# Altium PCB PCB1.PcbDoc
Units mm, origin at the board's own origin, x right, y up, seen from the top; angles counter-clockwise.
Board outline 53.35 x 53.15 mm, 2 copper layers (Top Layer, Bottom Layer); 14 components, 14 nets, 68 pads, 9 vias.
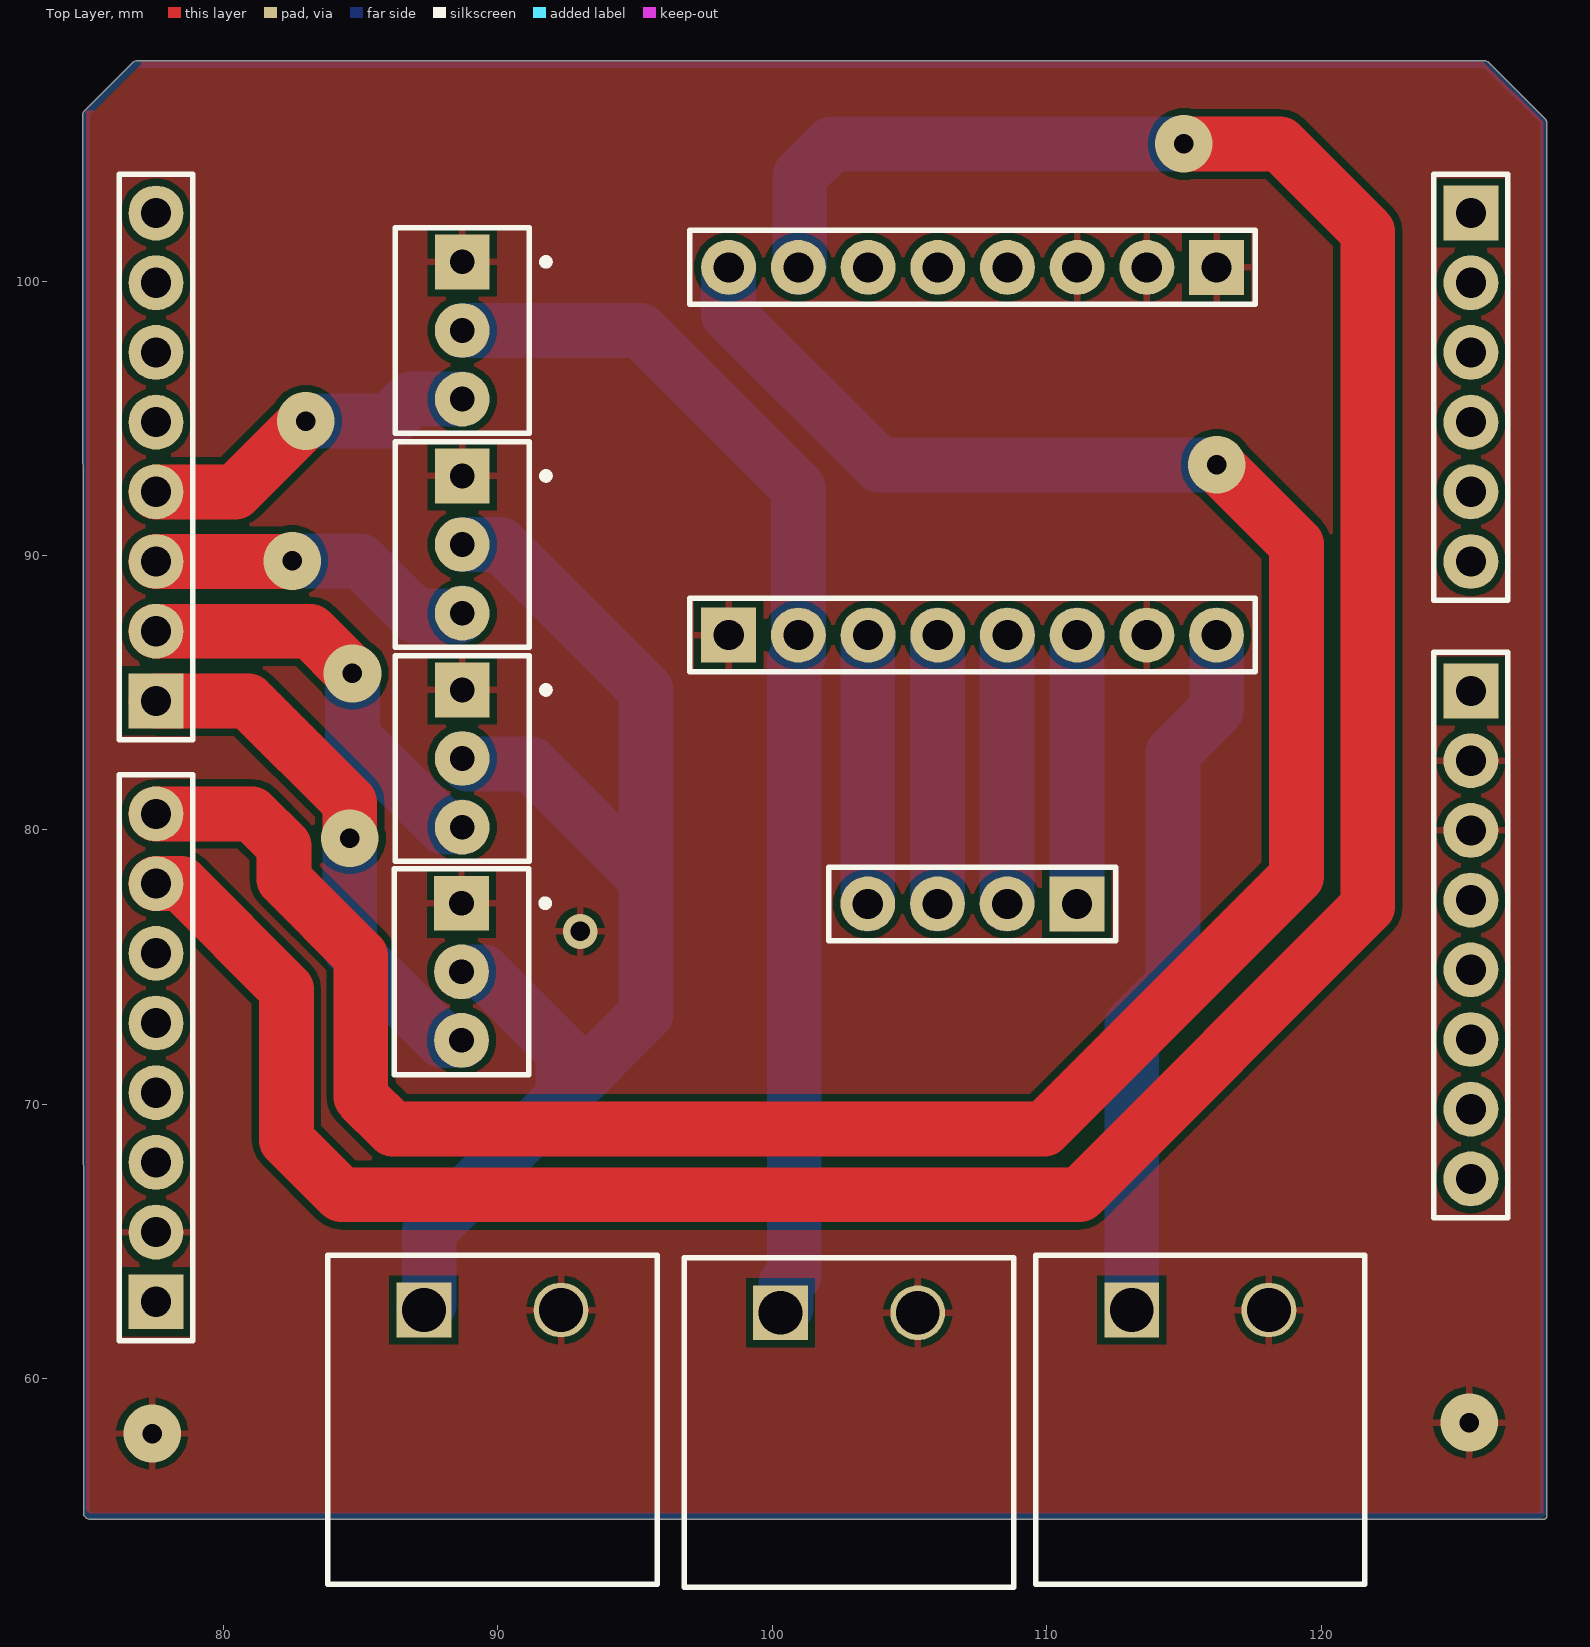
[diagram p0: Top Layer view]
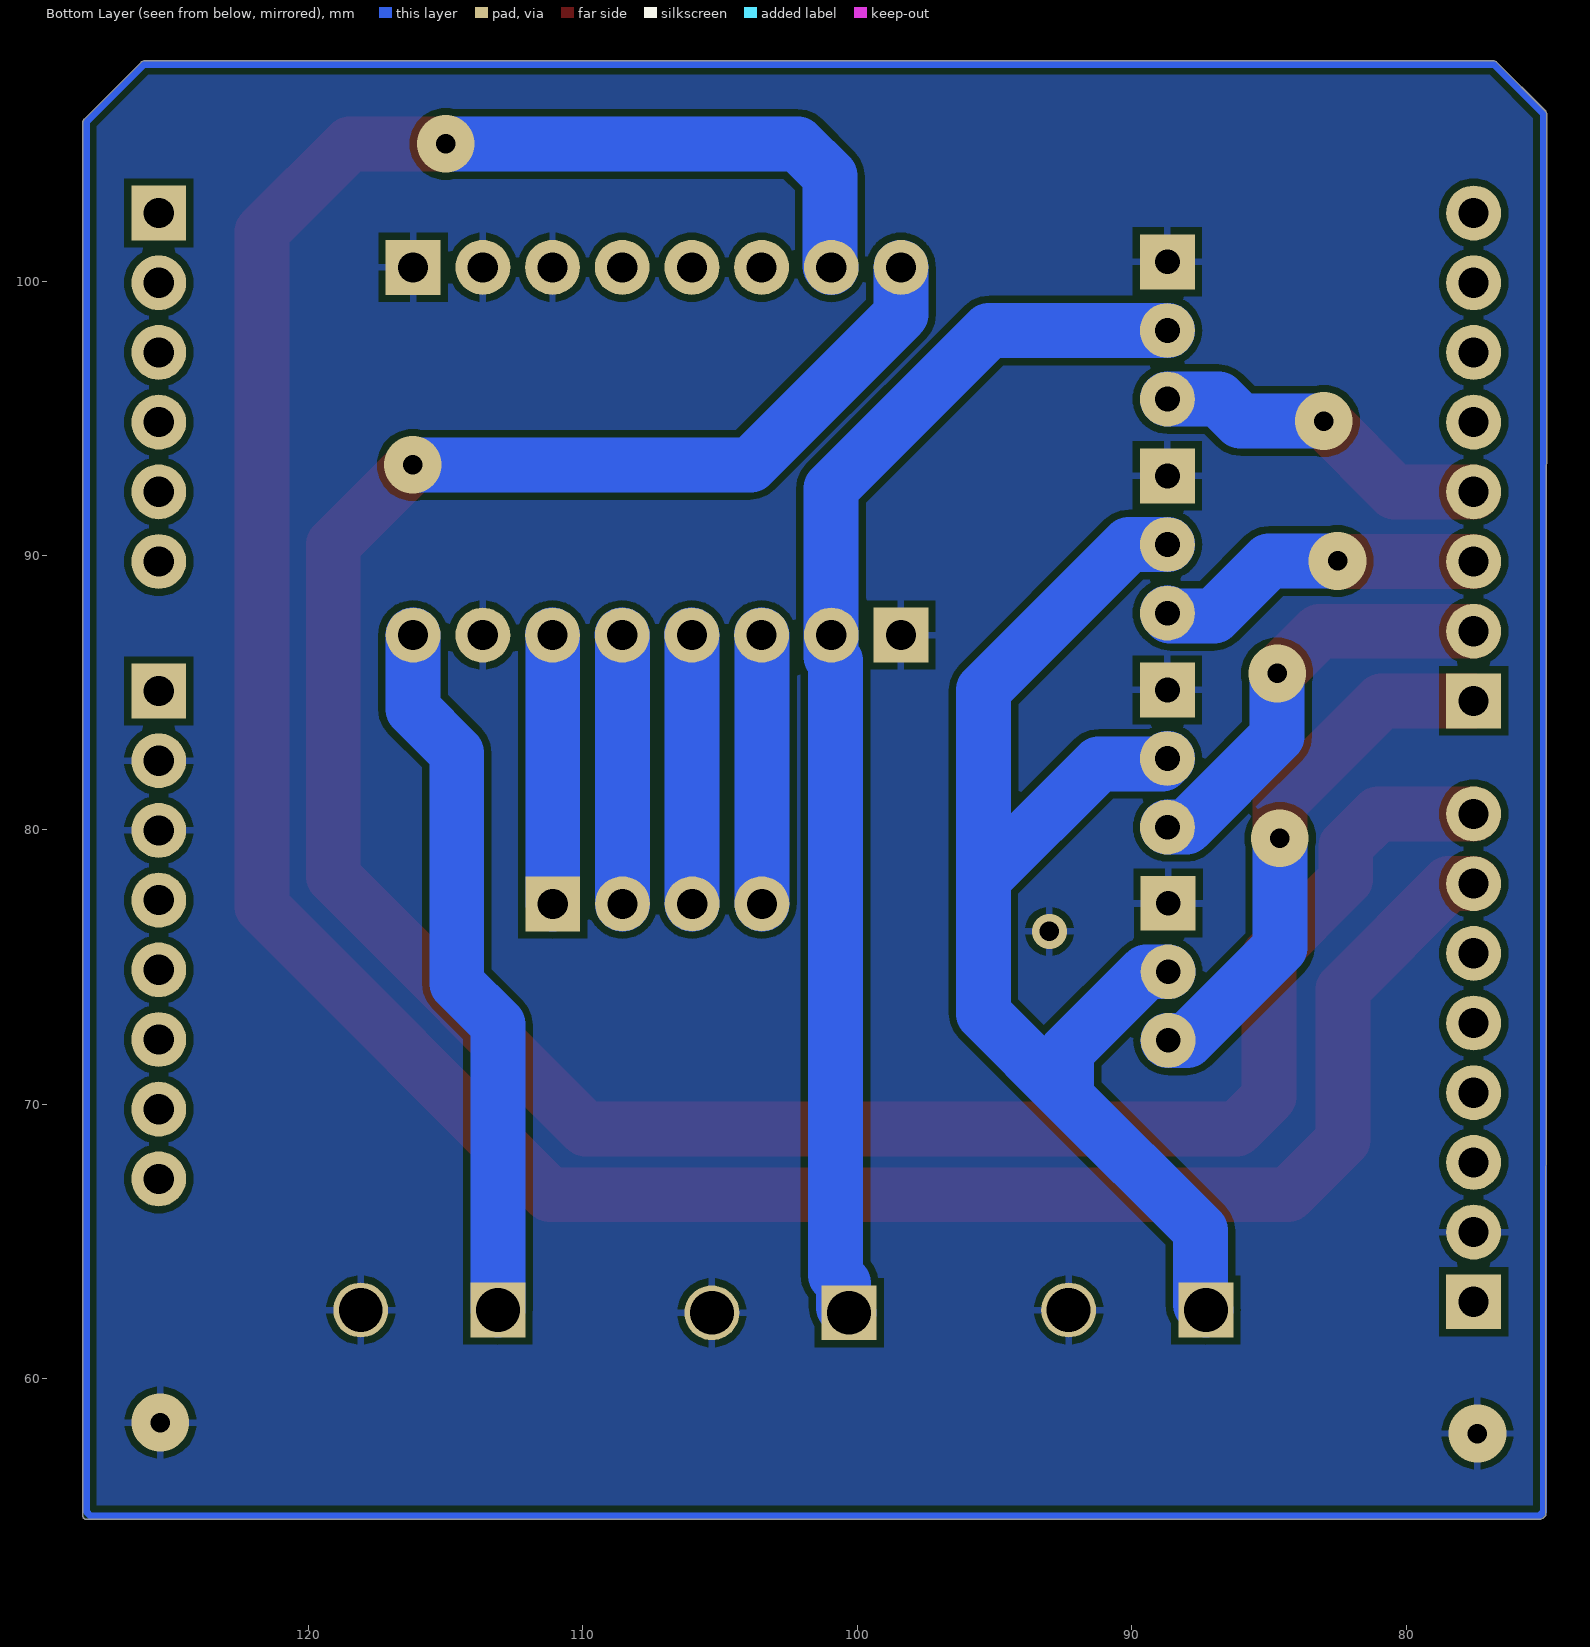
[diagram p1: Bottom Layer view, seen from below]
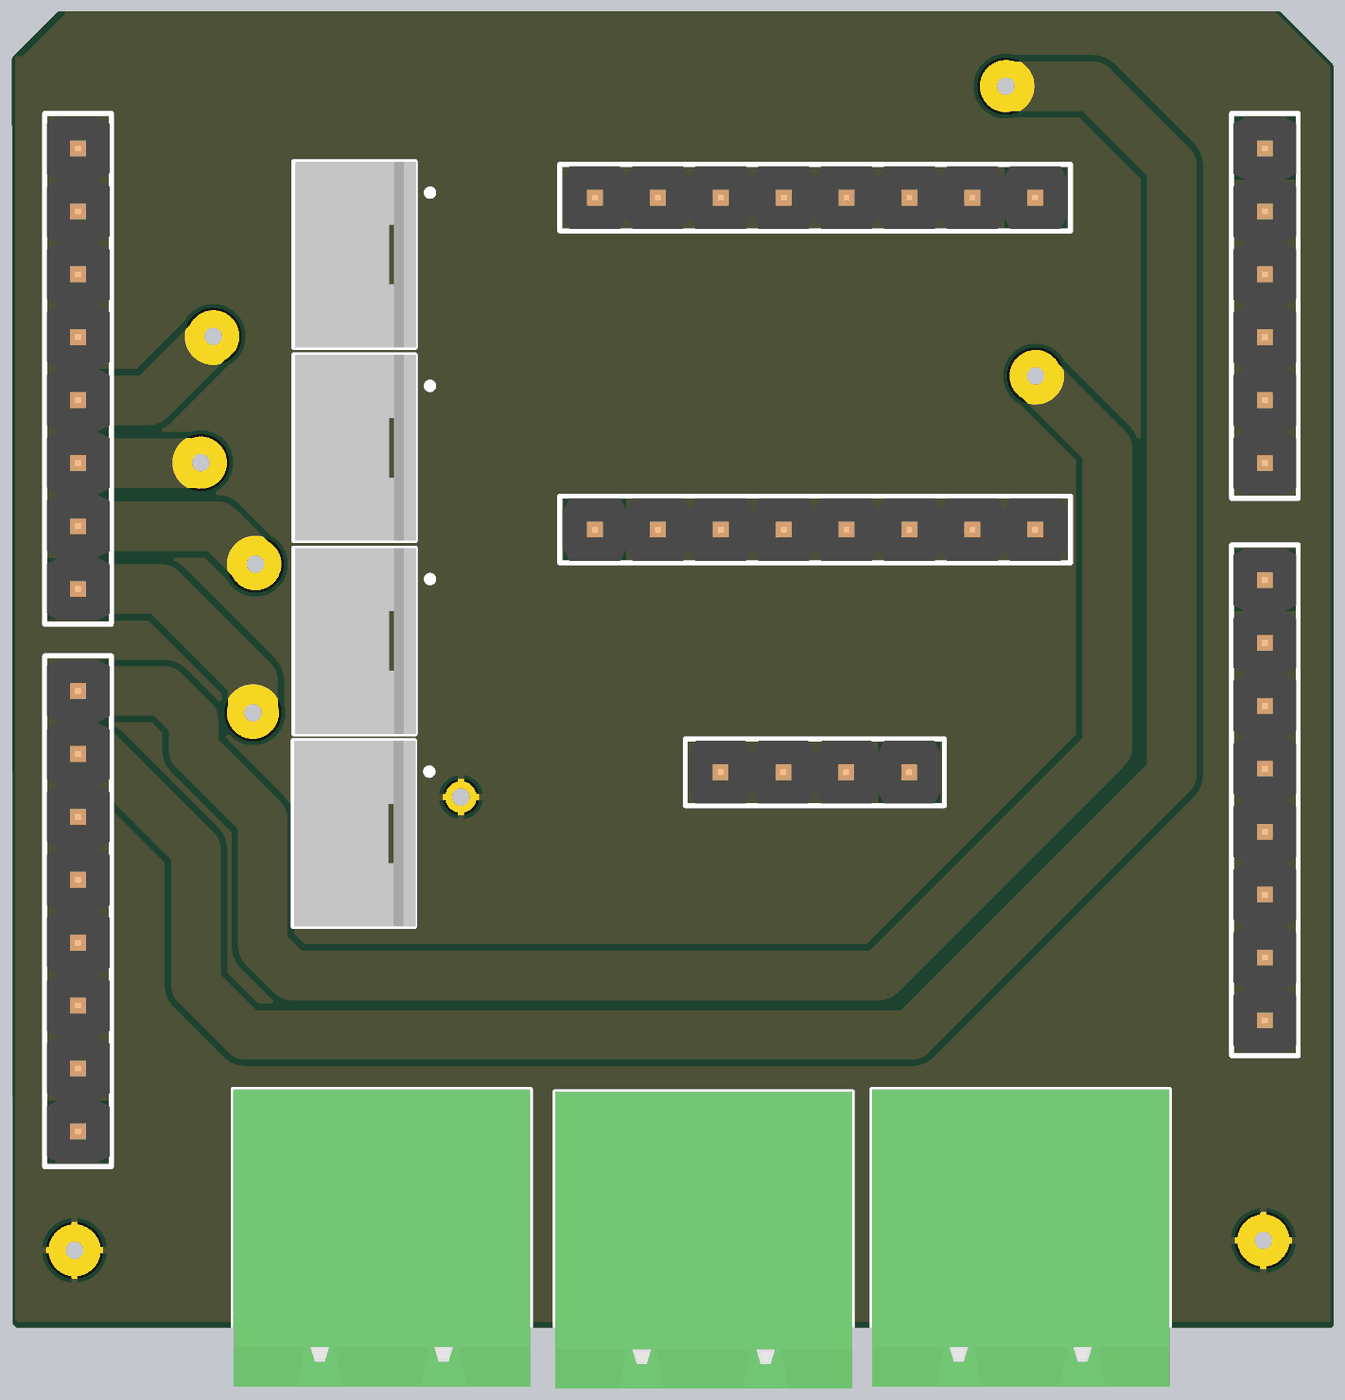
[diagram p2: 3D render of the assembled board from above, using the file's embedded part models]

## Layer stack, top to bottom
Top Solder: solder mask 0.0102, Solder Resist, Dk 3.5
Top Layer: signal copper 0.0356
Dielectric 1: dielectric 0.32, FR-4, Dk 4.8
Bottom Layer: signal copper 0.0356
Bottom Solder: solder mask 0.0102, Solder Resist, Dk 3.5

## Board outline
74.91,55.01 75.01,54.91 75.1,54.873 128.1,54.873 ccw(c128.1,55) 128.227,55 128.227,105.8 128.19,105.89 126.09,107.99 126,108.027 76.8,108.027 76.71,107.99 74.91,106.19 74.873,106.1

## Design rules (kind name [scope] priority, off if disabled: settings)
Clearance [All] p1: gap=0.254 ignorepadtopadclearanceinfootprint=FALSE except(0: Arc-Hole Track-Hole SMDPad-Hole THPad-Hole Via-Hole Fill-Hole Poly-Hole Region-Hole Text-Hole)
PolygonConnect [All] p1: connectstyle=Relief reliefconductorwidth=0.254 reliefentries=4 polygonreliefangle="90 Angle" airgapwidth=0.254
RoutingVias [All] p1: holewidth=0.711 width=1.27 viastyle="Through Hole" minholewidth=0.711 minwidth=1.27 maxholewidth=0.711 maxwidth=1.27
SolderMaskExpansion [All] p1: expansion=0.102 istentingtop=FALSE
Width Width_1 [All] p1: maxlimit=2 minlimit=2 preferedwidth=2 minimp=50.000000 maximp=50.000000 favimp=50.000000
Width [All] p2: maxlimit=0.254 minlimit=0.254 preferedwidth=0.254
30 further rules are at their usual default settings.

## Classes and differential pairs
component class Sheet1: J1 J2 J3 Stepper1

## Components (designator, comment, footprint, x,y, rotation, side; value= is the part's Value field where it differs from the comment)
P1 "" 61300811121 77.54,93.59 r90 top
P2 "" 61300611121 125.46,96.13 r270 top
P3 "" 61300811121 125.46,76.17 r270 top
P4 "" 61300811121 77.54,71.69 r90 top
P5 "" 61300811121 107.3,87.1 r0 top
P6 "" 61300811121 107.3,100.5 r180 top
P? "" 691313710002 102.8,58.4 r0 top
P? "" 691313710002 115.6,58.5 r0 top
P? "" 691313710002 89.8,58.5 r0 top
Pince1 "" TECO-171825-3_V 88.7,98.2 r270 top
Pivot1 "" TECO-171825-3_V 88.7,90.4 r270 top
Segment1 "" TECO-171825-3_V 88.7,82.6 r270 top
Segment2 "" TECO-171825-3_V 88.673,74.827 r270 top
Stepper1 "" 61300411121 107.29,77.3 r180 top

## Footprints (in the part's own frame and the unit in brackets; to place one, negate y for a bottom-side part, rotate by r counter-clockwise, add the part's x,y. Pads: shape width x height; smd on the part's side, far side on the other; paste and mask are expansions set on the pad)
61300411121 [mm] "Pin Header, pitch 2.54 mm, THT, Vertical, single row, 4p"
  rect 2x2 hole 1.1: 1(-3.81,0)
  round 2 hole 1.1: 2(-1.27,0) 3(1.27,0) 4(3.81,0)
  silkscreen extent -5.23,-1.35 5.23,1.34, body extent -5.08,-1.27 5.08,1.27, height 8.57
61300611121 [mm] "Pin Header, pitch 2.54 mm, THT, Vertical, single row, 6p"
  rect 2x2 hole 1.1: 1(-6.35,0)
  round 2 hole 1.1: 2(-3.81,0) 3(-1.27,0) 4(1.27,0) 5(3.81,0) 6(6.35,0)
  silkscreen extent -7.77,-1.34 7.77,1.34, body extent -7.62,-1.27 7.62,1.27, height 8.57
61300811121 [mm] "Pin Header, pitch 2.54 mm, THT, Vertical, single row, 8p"
  rect 2x2 hole 1.1: 1(-8.89,0)
  round 2 hole 1.1: 2(-6.35,0) 3(-3.81,0) 4(-1.27,0) 5(1.27,0) 6(3.81,0) 7(6.35,0) 8(8.89,0)
  silkscreen extent -10.31,-1.34 10.31,1.34, body extent -10.16,-1.27 10.16,1.27, height 8.57
691313710002 [mm] "5.00mm - Closed Horizhontal PCB Header - -02p"
  rect 2x2 hole 1.6: 1(-2.5,4)
  round 2 hole 1.6: 2(2.5,4)
  silkscreen extent -6,-6 6,6, body extent -6,-6 6,6, height 8.55
TECO-171825-3_V [mm] "Connector, 3-Leads, Body 4.9x7.5mm, Pitch 2.5mm"
  rect 2x2 hole 0.9: 1(-2.5,0)
  round 2 hole 0.9: 2(0,0) 3(2.5,0)
  silkscreen extent -3.75,-2.45 3.75,3.17, body extent -3.75,-2.4 3.75,2.5, height 10.4

## Part data
P1 P3 P4 P5 P6: library part CMP-1502-01076-1, "THT Vertical Pin Header WR-PHD, Pitch 2.54 mm, Single Row, 8 pins", Contact Resistance=20mOhm, Manufacturer="Wurth Elektronik", Operating Temperature=-40to105degC, Package Reference=61300811121, Rated Current=3A, Withstanding Voltage=500VAC, Working Voltage=250VAC, Datasheet URL=https://katalog.we-online.de/em/datasheet/6130xx11121.pdf, Gender=Male, Manufacturer URL=http://www.we-online.de, Mounting Technology=THT, Orientation=Vertical, Packaging=Bag, Part Number=61300811121, Pin Number=8, Pitch=2.54mm, Publisher=WurthElektronik, Row Number=Single
P2: library part CMP-1502-01070-1, "THT Vertical Pin Header WR-PHD, Pitch 2.54 mm, Single Row, 6 pins", Contact Resistance=20mOhm, Manufacturer="Wurth Elektronik", Operating Temperature=-40to105degC, Package Reference=61300611121, Rated Current=3A, Withstanding Voltage=500VAC, Working Voltage=250VAC, Datasheet URL=https://katalog.we-online.de/em/datasheet/6130xx11121.pdf, Gender=Male, Manufacturer URL=http://www.we-online.de, Mounting Technology=THT, Orientation=Vertical, Packaging=Bag, Part Number=61300611121, Pin Number=6, Pitch=2.54mm, Publisher=WurthElektronik, Row Number=Single
P? P? P?: library part CMP-1502-02048-1, "Serie 3137 - 5.00mm Close Horizontal PCB Header WR-TBL, 2 pin", Manufacturer="Wurth Elektronik", Operating Temperature=-40to105degC, Package Reference=691313710002, Datasheet URL=http://katalog.we-online.de/em/datasheet/6913137100xx.pdf, Gender=Male, Manufacturer URL=http://www.we-online.de, Mounting Technology=THT, Packaging=Box, Part Number=691313710002, Pin Number=2, Pitch=5.00mm, Publisher=WurthElektronik
Pince1 Pivot1 Segment1 Segment2: library part CMP-2000-07494-1, "Male Header, Pitch 2.5 mm, 1 x 3 Position, Height 10.4 mm, Tail Length 3.6 mm,  / -20 to 95 degC / , RoHS, Bulk", Colour=Natural, Contact Resistance=20mOhm, Flammability Rating=UL94V-0, Manufacturer="TE Connectivity", Max Current Rating=3.5A, Max Operating Temperature=95degC, Max Voltage Rating (AC)=250V, Max Voltage Rating (DC)=350.25kV, Min Operating Temperature=-20degC, Package Description="Male Header, Pitch 2.5 mm, 1 x 3 Position, Height 10.4 mm, Tail Length 3.6 mm", Package Quantity=1000, Package Reference=171825-3, Voltage Rating=350V, Approvals=UL, Backwall/Post Interruptions=No(Without), Connector Type=Header, Contact Gender=Male, Contact Material=Brass, Contact Mating Length=0.295inch, Contact Plating=Tin, Contact Retention=No(Without), Contact Shape=Square, Datasheet URL=http://www.te.com/commerce/DocumentDelivery/DDEController?Action=showdoc&DocId=Customer+Drawing%7F171825%7FY3%7Fpdf%7FEnglish%7FENG_CD_171825_Y3.pdf%7F171825-3, Datasheet Version="Rev. Y3, 12/2016", Depth=4.9mm, Height=0.409inch, Housing Colour=Natural, Housing Material=Nylon, Length=7.5mm, Manufacturer URL=http://www.te.com/, Mating Alignment=Yes(With), Mating Post Length=7.5mm, Mating Retention=Yes(With), Mount=ThroughHole, Mounting Technology=ThroughHole, Number of Contacts=3, Number of Positions=3, Number of Rows=1, Orientation=Straight, Packaging=Bag, Panel Mount Retention=No(Without), PCB Mount Alignment=No(Without), PCB Mount Retention=Without, PCB Mounting Orientation=Vertical, PCB Thickness=0.063inch, Pitch=2.5mm, Plating Thickness=0.8um, REACH SVHC=NoSVHC, RoHSCompliant=True, Strain Relief=No(Without), Tail Length=0.142inch, Termination=Solder
Stepper1: library part CMP-1502-01064-1, "THT Vertical Pin Header WR-PHD, Pitch 2.54 mm, Single Row, 4 pins", Contact Resistance=20mOhm, Manufacturer="Wurth Elektronik", Operating Temperature=-40to105degC, Package Reference=61300411121, Rated Current=3A, Withstanding Voltage=500VAC, Working Voltage=250VAC, Datasheet URL=https://katalog.we-online.de/em/datasheet/6130xx11121.pdf, Gender=Male, Manufacturer URL=http://www.we-online.de, Mounting Technology=THT, Orientation=Vertical, Packaging=Bag, Part Number=61300411121, Pin Number=4, Pitch=2.54mm, Publisher=WurthElektronik, Row Number=Single

## Via types
v1: diameter 2.1, hole 0.711, Top Layer to Bottom Layer, 8 vias
v2: diameter 1.27, hole 0.711, Top Layer to Bottom Layer, 1 vias

## Nets (pads, with @x,y where several pads share a name; then routed paths per layer and width w, separated by ;. In a path a pad name is that pad's centre, name@x,y a point inside that pad or via, vN(x,y) a via of type N, cw(c..) or ccw(c..) an arc to the next point about the centre after c; other vN are vias at no path point)
+5: P5.2 P?.1@100.3,62.4 Pince1.2 | length 45
  Bottom Layer w2: Pince1.2 95.2,98.2 100.96,92.44 100.96,86.323 100.8,86.163 100.8,63.772 100.5,63.472 100.5,62.6 P?.1@100.3,62.4
+7.3: P?.1@87.3,62.5 Pivot1.2 Segment1.2 Segment2.2 | length 49.9
  Bottom Layer w2: P?.1@87.3,62.5 87.5,62.7 87.5,65.4 92.372,70.272 ; Segment2.2 89.473,74.827 92.372,71.928 92.372,70.272 ; Segment1.2 88.9,82.4 91.2,82.4 95.4,78.2 ; Pivot1.2 90.1,90.4 95.4,85.1 95.4,78.2 ; 92.372,70.272 95.4,73.3 95.4,78.2
+12: P5.8 P?.1@113.1,62.5 | length 25.9
  Bottom Layer w2: P?.1@113.1,62.5 113.1,72.9 114.6,74.4 114.6,82.8 116.2,84.4 P5.8@116.2,87.1
dirPin: P4.8 P6.8 | length 91.8
  Top Layer w2: P4.8 81.028,80.58 82.2,79.408 82.2,78.2 85,75.4 85,70.272 86.172,69.1 109.9,69.1 119.1,78.3 119.1,90.4 v1(116.2,93.3)
  Bottom Layer w2: P6.8 98.41,98.79 103.9,93.3 v1(116.2,93.3)
GND: P3.2 P3.3 P4.2 P5.1 P5.7 P6.1 P6.2 P6.3 P?.2 Pince1.1 Pivot1.1 Segment1.1 Segment2.1
  other v1: 77.4,58 125.4,58.4
  other v2: 93,76.3
NetP5_3: P5.3 Stepper1.4 | length 9.8
  Bottom Layer w2: Stepper1.4 103.48,87.08 P5.3@103.5,87.1
NetP5_4: P5.4 Stepper1.3 | length 9.8
  Bottom Layer w2: Stepper1.3 106.02,87.08 P5.4@106.04,87.1
NetP5_5: P5.5 Stepper1.2 | length 9.8
  Bottom Layer w2: Stepper1.2 108.56,87.08 P5.5@108.58,87.1
NetP5_6: P5.6 Stepper1.1 | length 9.8
  Bottom Layer w2: Stepper1.1 111.1,87.08 P5.6@111.12,87.1
PWM4: P1.4 Pince1.3 | length 12.6
  Top Layer w2: P1.4 80.42,92.32 v1(83,94.9)
  Bottom Layer w2: v1(83,94.9) 86.033,94.9 86.833,95.7 Pince1.3
PWM5: P1.3 Pivot1.3 | length 12
  Top Layer w2: P1.3 82.48,89.78 v1(82.5,89.8)
  Bottom Layer w2: v1(82.5,89.8) 85,89.8 87,87.8 88.6,87.8 Pivot1.3
PWM6: P1.2 Segment1.3 | length 15.5
  Top Layer w2: P1.2 83.16,87.24 v1(84.7,85.7)
  Bottom Layer w2: v1(84.7,85.7) 84.7,83.412 88.012,80.1 Segment1.3
PWM7: P1.1 Segment2.3 | length 19.4
  Top Layer w2: P1.1 80.9,84.7 84.6,81 v1(84.6,79.7)
  Bottom Layer w2: v1(84.6,79.7) 84.6,75.712 87.985,72.327 Segment2.3
stepPin: P4.7 P6.7 | length 106.9
  Top Layer w2: P4.7 78.45,78.04 82.3,74.19 82.3,68.7 84.3,66.7 111.2,66.7 121.7,77.2 121.7,101.8 118.5,105 v1(115,105)
  Bottom Layer w2: P6.7 101,100.55 101,103.828 102.172,105 v1(115,105)
pads on no net: P1.5 P1.6 P1.7 P1.8 P2.1 P2.2 P2.3 P2.4 P2.5 P2.6 P3.1 P3.4 P3.5 P3.6 P3.7 P3.8 P4.1 P4.3 P4.4 P4.5 P4.6 P6.4 P6.5 P6.6
copper on no net: | length 209.9
  Bottom Layer w0.254: 125.46,84.66 125.46,85.06 ; 75,55.149 75,106.1 76.8,107.9 126,107.9 128.1,105.8 128.1,55.149 127.951,55 75.149,55 75,55.149

## Polygon pours and split planes (outlines as drawn)
GND on Top Layer "GND_L01_P001" (solid, pour order 1): 77,108 125.9,108 128.1,105.8 128.1,55.1 75.1,55.1 75,55.2 75,106.2 75.3,106.2 77,107.9
GND on Bottom Layer "GND_L02_P000" (solid, pour order 0): 125.9,108 128.1,105.8 128.1,55.149 127.951,55 127.877,55.074 75.074,55.074 75.074,106.026 75,106.1 76.9,108

## Silkscreen, mask and mechanical layers (free items; w line width, h text height)
Mechanical 1:
  lines w0.254: 126.3,107.6 126,107.9 ; 126,107.9 125.7,107.9 76.8,107.9 75,106.1 75,55.1 75.1,55 128.1,55 128.1,105.8 126,107.9
Mechanical 13:
  text "Shield Arduino Bras Robot" at 80.354,104.954 h1